# EAGLE board UD0012 (EAGLE 6.1)
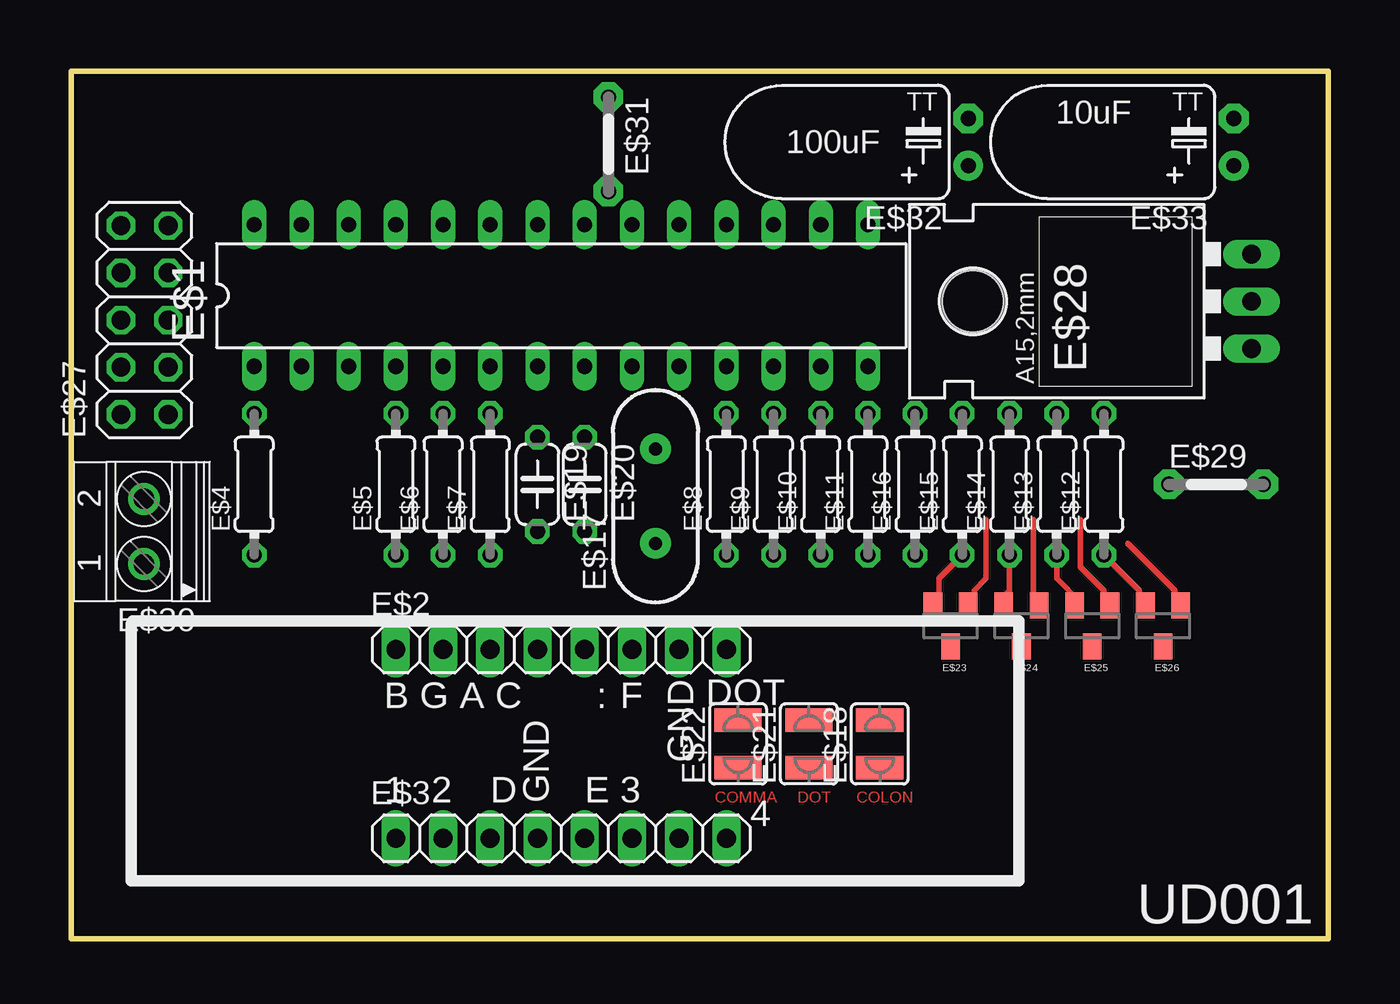
[diagram p0: board, top side]
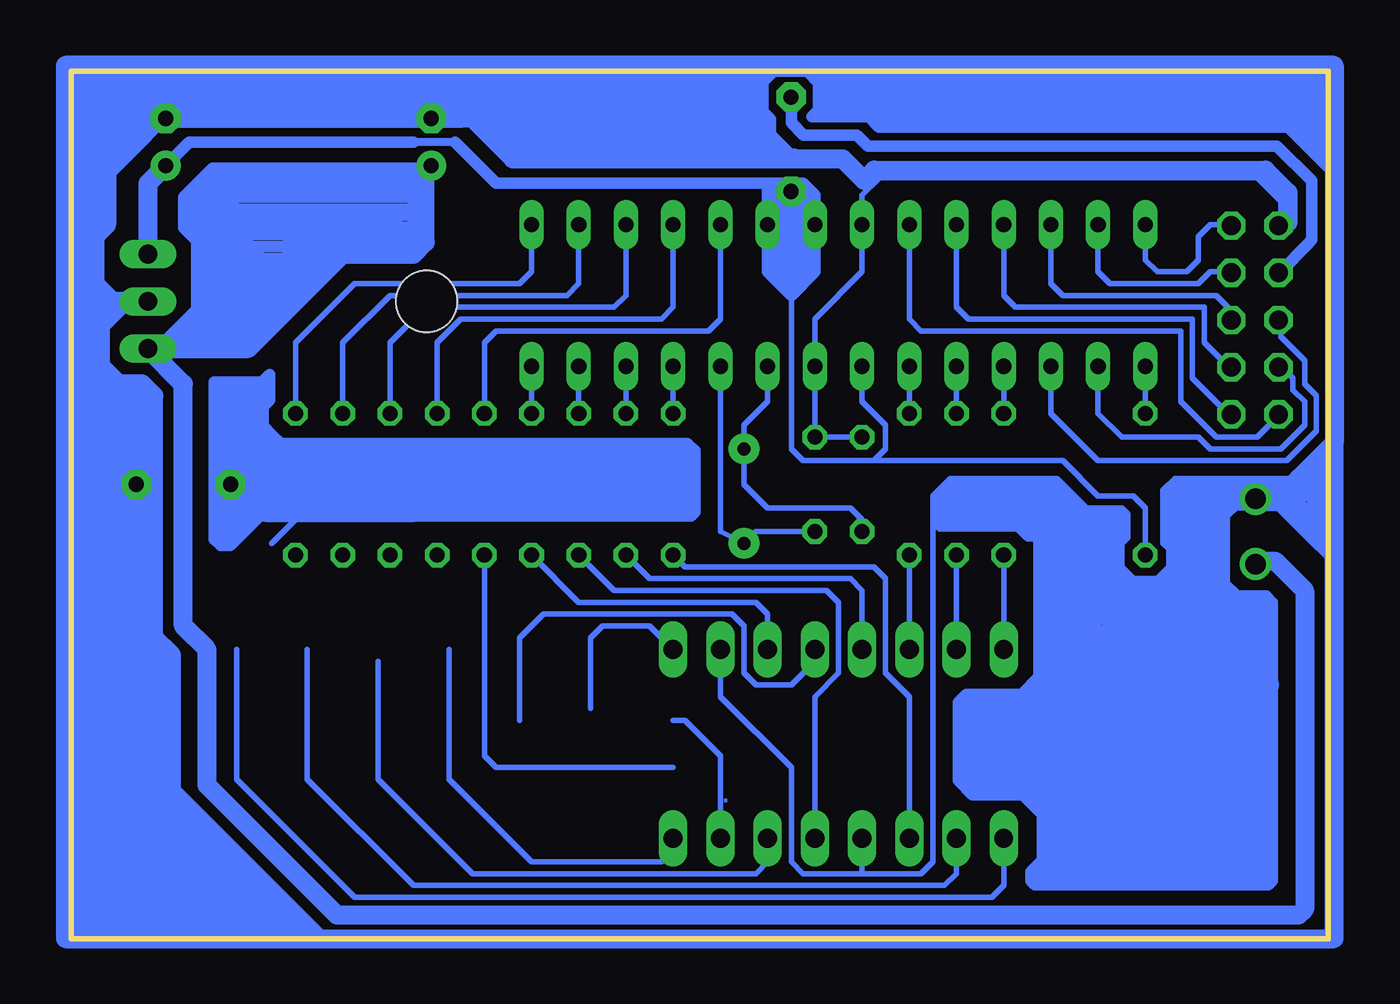
[diagram p1: board, bottom side, seen from below]

Size 67.63 x 46.67 mm. Coordinates in mm from the lower left corner, seen from the top.
Outline: 67.63,46.67 0,46.67 0,0 67.63,0 67.63,46.67
Copper layers (1*16): Top 0.035mm / dielectric 1.5mm / Bottom 0.035mm
Design rules: minimum track width 10mil, minimum drill 24mil, track to track 8mil, track to pad 8mil, pad to pad 8mil, via to via 8mil, smd to smd 8mil, copper to edge 40mil, drill to drill 8mil, minimum pad ring 10mil, minimum via ring 8mil, stop-mask expansion 4mil, vias tented up to drill 0mil, thermal gap 10mil

## Footprints (pad centres in the part's own frame; a part is rotated, then mirrored left to right if it is on the bottom)
DIL28-3 = drill 0.813 long: 1 -16.51,-3.81; 2 -13.97,-3.81; 3 -11.43,-3.81; 4 -8.89,-3.81; 5 -6.35,-3.81; 6 -3.81,-3.81; 7 -1.27,-3.81; 8 1.27,-3.81; 9 3.81,-3.81; 10 6.35,-3.81; 11 8.89,-3.81; 12 11.43,-3.81; 13 13.97,-3.81; 14 16.51,-3.81; 15 16.51,3.81; 16 13.97,3.81; 17 11.43,3.81; 18 8.89,3.81; 19 6.35,3.81; 20 3.81,3.81; 21 1.27,3.81; 22 -1.27,3.81; 23 -3.81,3.81; 24 -6.35,3.81; 25 -8.89,3.81; 26 -11.43,3.81; 27 -13.97,3.81; 28 -16.51,3.81
1X08 = drill 1.016 long: 1 -8.89,0; 2 -6.35,0; 3 -3.81,0; 4 -1.27,0; 5 1.27,0; 6 3.81,0; 7 6.35,0; 8 8.89,0
0204/7 = drill 0.813 octagon: 1 -3.81,0; 2 3.81,0
HC49US = drill 0.7 pad 1.651: 1 -2.54,0; 2 2.54,0
SJW = smd 1.27 x 2.54: 1 -1.27,0; 2 1.27,0
C050-024X044 = drill 0.813 octagon: 1 -2.54,0; 2 2.54,0
SOT23 = smd 1 x 1.4: 1 -0.95,-1.1; 2 0.95,-1.1; 3 0,1.1
2X05 = drill 1.016 octagon: 1 -5.08,-1.27; 2 -5.08,1.27; 3 -2.54,-1.27; 4 -2.54,1.27; 5 0,-1.27; 6 0,1.27; 7 2.54,-1.27; 8 2.54,1.27; 9 5.08,-1.27; 10 5.08,1.27
78XXL = drill 1.016 long: GND 0,-3.81; IN -2.54,-3.81; OUT 2.54,-3.81 | hole 3.302: 0,11.176
05 = drill 0.813 pad 1.6 octagon: 1 -2.54,0; 2 2.54,0
1751248 = drill 1.1 pad 1.7: 1 -1.75,-0.1; 2 1.75,-0.1
TT2D6L = drill 0.813 pad 1.6: + -1.27,0 | drill 0.813 pad 1.6 octagon: - 1.27,0

## Placement (x,y rotation side)
E$1  [DIL28-3]  26.35,34.61 0 top
E$2  [1X08]  26.35,15.56 0 top
E$3  [1X08]  26.35,5.4 0 top
E$4  [0204/7]  9.84,24.45 90 top
E$5  [0204/7]  17.46,24.45 90 top
E$6  [0204/7]  20,24.45 90 top
E$7  [0204/7]  22.54,24.45 90 top
E$8  [0204/7]  35.24,24.45 90 top
E$9  [0204/7]  37.78,24.45 90 top
E$10  [0204/7]  40.32,24.45 90 top
E$11  [0204/7]  42.86,24.45 90 top
E$12  [0204/7]  55.56,24.45 90 top
E$13  [0204/7]  53.02,24.45 90 top
E$14  [0204/7]  50.48,24.45 90 top
E$15  [0204/7]  47.94,24.45 90 top
E$16  [0204/7]  45.4,24.45 90 top
E$17  [HC49US]  31.43,23.81 90 top
E$18  [SJW]  43.5,10.48 90 top
E$19  [C050-024X044]  25.08,24.45 270 top
E$20  [C050-024X044]  27.62,24.45 270 top
E$21  [SJW]  39.69,10.48 90 top
E$22  [SJW]  35.88,10.48 90 top
E$23  [SOT23]  47.31,16.83 180 top
E$24  [SOT23]  51.12,16.83 180 top
E$25  [SOT23]  54.93,16.83 180 top
E$26  [SOT23]  58.74,16.83 180 top
E$27  [2X05]  3.94,33.29 90 top
E$28  [78XXL]  59.69,34.29 90 top
E$29  [05]  61.59,24.45 0 top
E$30  [1751248]  3.81,21.91 90 top
E$31  [05]  28.9,42.74 270 top
E$32  [TT2D6L]  48.26,42.86 90 top
E$33  [TT2D6L]  62.55,42.86 90 top

## Library data of the parts
E$1 = atmel
E$2 E$3 E$27 = pinhead
E$4-E$16 E$19 E$20 E$32 E$33 = rcl
E$17 = SparkFun-FreqCtrl
E$18 E$21 E$22 E$29 E$31 = jumper
E$23-E$26 = SparkFun-DiscreteSemi
E$28 = SparkFun-PowerIC
E$30 = con-phoenix-350

## Nets
S$1: E$1.1 E$4.2
S$2: E$1.4 E$5.2
S$3: E$1.5 E$6.2
S$4: E$1.6 E$7.2
S$5: E$1.11 E$8.2
S$6: E$1.12 E$9.2
S$7: E$1.13 E$10.2
S$8: E$1.14 E$11.2
S$9: E$16.1
S$10: E$1.10 E$17.1 E$20.2
S$18: E$1.23
S$19: E$1.24
S$20: E$1.25
S$21: E$1.26
S$22: E$1.27
S$23: E$1.28
S$24: E$16.2
S$25: E$15.2
S$26: E$14.2
S$27: E$13.2
S$28: E$12.2
S$29: E$1.2
S$31: E$2.1 E$5.1
S$32: E$6.1
S$33: E$2.3 E$7.1
S$34: E$3.3 E$8.1
S$35: E$2.4 E$9.1
S$36: E$3.5 E$10.1
S$37: E$2.6 E$11.1
S$38: E$2.5
S$39: E$3.8
S$40: E$3.6
S$42: E$3.1
S$44: E$2.8
S$45: E$3.7
S$46: E$1.7 E$1.20 E$1.21 E$28.OUT
S$47: E$15.1
S$48: E$14.1
S$49: E$13.1
S$50: E$12.1
S$57: E$28.IN E$32.+
S$59: E$1.9 E$17.2 E$19.2
S$69: E$29.1
S$72: E$32.-
S$73: E$28.GND
S$74: E$2.7 E$3.4
S$89: E$1.8 E$1.22 E$19.1 E$20.1

## Tracks (layer width: path | path; a pad name or v marks a point on that pad's centre or on a via)
S$1
  Bottom 0.305: E$4.2 E$1.1
S$2
  Bottom 0.305: E$5.2 E$1.4
S$3
  Bottom 0.305: E$6.2 E$1.5
S$4
  Bottom 0.305: E$7.2 E$1.6
S$5
  Bottom 0.305: E$8.2 E$1.11
S$6
  Bottom 0.305: E$9.2 E$1.12
S$7
  Bottom 0.305: E$10.2 E$1.13
S$8
  Bottom 0.305: E$11.2 E$1.14
S$9
  Bottom 0.305: 35.24,9.21 44.77,9.21 45.4,9.84 E$16.1
S$10
  Bottom 0.305: E$1.10 32.7,21.91 E$17.1 30.8,21.91 E$20.2
S$12
  Bottom 0.305: 32.7,38.42 32.7,33.34 33.34,32.7 44.77,32.7
S$13
  Bottom 0.305: 35.24,38.42 35.24,33.97 35.88,33.34 46.67,33.34
S$14
  Bottom 0.305: 37.78,38.42 37.78,34.61 38.42,33.97 47.31,33.97
S$15
  Bottom 0.305: 40.32,38.42 40.32,35.24 40.96,34.61 47.31,34.61
S$16
  Bottom 0.305: 42.86,38.42 42.86,35.88 43.5,35.24 47.31,35.24
S$17
  Bottom 0.305: 46.98,42.87 49.12,42.87 49.19,42.79 46.98,42.79 46.96,42.77
S$18
  Bottom 0.305: E$1.23 22.54,33.34 21.91,32.7 7.94,32.7 7.94,28.89 6.03,26.99 3.81,26.99 2.54,28.26
S$19
  Bottom 0.305: E$1.24 20,33.97 19.37,33.34 7.3,33.34 7.3,30.16 5.4,28.26
S$20
  Bottom 0.305: E$1.25 17.46,34.61 16.83,33.97 6.67,33.97 6.67,32.07 5.4,30.8
S$21
  Bottom 0.305: E$1.26 14.92,35.24 14.29,34.61 6.03,34.61 5.4,33.97 5.4,33.34 5.08,33.02
S$22
  Bottom 0.305: E$1.27 12.38,35.88 11.75,35.24 6.99,35.24 6.35,35.88 5.08,35.88
S$23
  Bottom 0.305: E$1.28 9.84,36.51 9.21,35.88 7.62,35.88 6.99,36.51 6.99,37.78 6.35,38.42 5.4,38.42
S$24
  Bottom 0.305: E$16.2 45.4,32.07 44.77,32.7
S$25
  Bottom 0.305: 44.77,33.34 46.67,33.34 47.94,32.07 E$15.2
S$26
  Bottom 0.305: 44.77,33.97 48.58,33.97 50.48,32.07 E$14.2
S$27
  Bottom 0.305: 44.77,34.61 50.48,34.61 53.02,32.07 E$13.2
S$28
  Bottom 0.305: 44.77,35.24 52.39,35.24 55.56,32.07 E$12.2
S$29
  Bottom 0.305: E$1.2 12.38,28.26 11.11,26.99 6.99,26.99 6.35,26.35 2.54,26.35 1.27,27.62 1.27,28.89 1.9,29.53 1.9,30.16 2.54,30.8
S$30
  Bottom 0.305: 14.92,30.16 14.92,28.26 12.38,25.72 2.22,25.72 0.64,27.31 0.64,29.21 1.27,29.84 1.27,31.11 2.54,32.39 2.54,33.34
S$31
  Bottom 0.305: E$2.1 E$5.1
S$32
  Bottom 0.305: 20,16.19 E$6.1
S$33
  Bottom 0.305: E$2.3 E$7.1
S$34
  Bottom 0.305: E$3.3 22.54,13.02 23.81,14.29 23.81,19.37 24.45,20 34.61,20 E$8.1
S$35
  Bottom 0.305: E$2.4 25.08,18.73 25.72,19.37 36.51,19.37 E$9.1
S$36
  Bottom 0.305: E$3.5 27.62,13.02 26.35,14.29 26.35,18.1 26.99,18.73 38.42,18.73 E$10.1
S$37
  Bottom 0.305: E$2.6 30.16,17.46 30.8,18.1 40.32,18.1 E$11.1
S$38
  Bottom 0.305: E$2.5 27.62,14.92 28.89,13.65 30.8,13.65 31.43,14.29 31.43,16.83 32.07,17.46 42.23,17.46 43.5,16.19 43.5,11.75
S$39
  Bottom 0.305: E$3.8 35.24,4.76 35.88,4.13 42.86,4.13 47.31,8.57 47.31,15.56
S$40
  Bottom 0.305: E$3.6 30.16,4.13 30.8,3.49 46.04,3.49 51.12,8.57 51.12,14.92
S$41
  Bottom 1.016: 0.32,22.54 0.32,25.08
S$42
  Bottom 0.305: E$3.1 17.46,2.86 18.1,2.22 52.39,2.22 58.74,8.57 58.74,15.56
S$43
  Bottom 1.016: 66.04,43.81 66.04,38.73 66.36,38.42
S$44
  Bottom 0.305: E$2.8 36.51,16.83 39.05,16.83 39.69,16.19 39.69,12.38
S$45
  Bottom 0.305: E$3.7 32.7,9.84 34.61,11.75 35.24,11.75
S$46  (via drill 0.6)
  Bottom 0.305: E$1.7 25.08,28.89 23.81,27.62 23.81,26.35 24.45,25.72 | 28.89,34.61 28.89,26.35 28.26,25.72 24.45,25.72 | 24.45,25.72 14.29,25.72 12.38,23.81 10.48,23.81 9.84,23.18 9.84,20.32 | 30.16,40.32 30.48,40.64 | 46.99,42.86 49.53,42.86
  Bottom 0.61: 30.16,40.32 E$1.20 30.16,35.88 28.89,34.61 27.62,35.88 E$1.21 27.62,40 28.26,40.64 30.48,40.64 44.77,40.64 46.99,42.86 | 49.21,42.86 49.53,42.86 61.28,42.86 62.87,41.28
  Bottom 1.016: E$28.OUT 63.5,40.64 62.87,41.28 v62.55,41.59
S$47
  Top 0.305: 46.67,18.1 46.67,19.37 E$15.1
S$48
  Top 0.305: 49.85,17.46 49.85,18.1 50.48,18.73 E$14.1
S$49
  Top 0.305: 54.29,18.1 53.02,19.37 E$13.1
S$50
  Top 0.305: 57.47,18.1 57.47,18.73 E$12.1
S$51
  Bottom 0.305: 54.93,15.56 54.93,8.57 49.21,2.86 20.64,2.86 20,3.49 20,5.4
S$52
  Top 0.305: 51.75,18.1 51.75,22.54
S$53
  Top 0.305: 55.56,18.1 55.56,18.73 54.29,20 54.29,22.54
S$54
  Top 0.305: 48.58,18.1 48.58,18.73 49.21,19.37 49.21,22.54
S$55
  Bottom 1.016: 0.64,23.5 0.64,23.18
S$56
  Bottom 0.305: 50.01,42.9 46.98,42.9 46.98,42.91 46.98,42.93 49.75,42.93 49.8,42.89
S$57
  Bottom 1.016: 4.13,20.32 2.86,20.32 1.27,18.73 1.27,1.59 1.59,1.27 53.34,1.27 60.32,8.26 60.32,15.56 61.59,16.83 61.59,29.84 E$28.IN 58.1,31.75 53.02,36.83 49.21,36.83 48.58,37.47 48.58,41.28 E$32.+
S$58
  Bottom 1.016: 67.31,33.66 67.31,6.03 66.67,5.4
S$59
  Bottom 0.305: E$1.9 30.16,28.89 31.43,27.62 E$17.2 31.43,24.45 30.16,23.18 25.72,23.18 25.08,22.54 E$19.2
S$60
  Bottom 1.016: 65.72,28.89 65.72,9.21 65.72,7.62 | 65.72,7.62 65.4,7.3 | 65.72,7.62 65.72,2.86
S$61
  Bottom 1.016: 65.09,28.89 65.09,11.11 65.09,10.48 | 65.09,10.48 64.77,10.16 | 65.09,10.48 65.09,4.13 65.72,3.49
S$62
  Bottom 1.016: 64.45,28.26 64.45,13.65
S$63
  Bottom 1.016: 63.82,15.56 63.82,2.86
S$64
  Bottom 1.016: 64.77,13.33 64.77,3.18
S$65
  Bottom 1.016: 66.99,7.94 66.99,0.63 55.88,0.63 62.87,7.62 62.87,15.24 63.18,15.56
S$66
  Bottom 1.016: 62.87,5.08 61.28,5.08 57.47,1.27 57.79,1.27 63.5,6.98
S$67
  Bottom 1.016: 63.18,5.72 62.87,5.72 58.42,1.27
S$68
  Bottom 1.016: 58.74,1.27 65.72,1.27 66.04,1.59 66.04,4.44 66.36,4.76 66.36,0.95 65.09,2.22 61.28,2.22 60.96,1.91 60.32,1.91 | 59.37,1.91 60.32,1.91 | 60.32,1.91 62.55,4.13 62.87,4.13 63.18,4.44 63.18,3.81 62.23,2.86 62.87,2.86 63.18,3.18 63.82,3.18 64.14,2.86 65.09,2.86
S$69
  Bottom 0.305: 55.56,22.54 56.83,21.27 | 49.21,22.54 55.56,22.54 | 55.56,22.54 57.15,22.54 E$29.1
S$70
  Bottom 1.016: 29.77,40.31 29.77,36.01 29.05,35.29 28.89,35.29 28.01,36.17 28.01,39.65 28.45,40.09 29.33,40.09 29.33,36.17 29.05,35.9 29.05,36.07 28.5,36.62 28.5,39.1 28.67,39.26
S$71
  Bottom 1.016: 46.62,44.17 46.07,44.17 43.87,41.96 26.13,41.96 24.98,40.8 | 24.98,40.8 | 24.98,40.8 24.43,41.36 3.38,41.36 2.17,40.14 2.17,38.54 2.39,38.32
S$72
  Bottom 0.406: 45.09,46.67 45.72,46.67 E$32.- 62.23,44.13 | 62.23,44.13 64.77,46.67 | 62.23,44.13 62.87,44.13 65.4,46.67
  Bottom 1.016: 46.35,46.67 48.26,44.77 62.87,44.77 64.77,46.67
S$73
  Bottom 1.016: 46.99,46.36 63.82,46.36 63.82,46.04 63.5,45.72 47.62,45.72 47.94,45.4 61.59,45.4 | 61.59,45.4 62.23,45.4 | 63.82,44.45 63.82,43.5 65.72,41.59 65.72,41.28 | 65.72,41.28 65.72,38.42 66.36,37.78 66.36,35.24 65.4,34.29 | E$28.GND 65.4,34.29 | 65.4,34.29 67.63,34.29 | 61.59,45.4 65.72,41.28
S$74
  Bottom 0.305: 1.59,24.76 8.25,24.76 8.89,24.13 8.89,23.81 | E$3.4 25.08,3.49 | 25.08,3.49 28.26,3.49 28.89,4.13 28.89,9.21 32.7,13.02 E$2.7 | 25.08,3.49 21.91,3.49 21.27,4.13 21.27,23.81 20.32,24.76 14.6,24.76 13.02,23.18 11.11,23.18 10.79,22.86 10.79,21.59 11.11,21.27 11.11,20 10.48,19.37 9.21,19.37 8.57,20 8.57,20.95 8.89,21.27 8.89,22.54 | 3.49,23.18 8.25,23.18 | 8.25,23.18 8.57,22.86 | 8.57,22.86 8.89,22.54 | 8.89,22.54 8.89,23.81 | 8.89,23.81 8.57,24.13 | 8.57,24.13 8.25,24.45 7.62,24.45 | 2.22,24.45 7.3,24.45 | 7.3,24.45 7.62,24.45 | 7.62,24.45 7.94,24.13 | 7.94,24.13 8.57,23.5 | 8.57,23.5 8.57,23.81 8.57,24.13 | 8.57,24.13 8.25,24.13 7.94,24.13 | 8.57,23.5 8.57,23.18 | 8.57,22.86 8.57,23.18 | 8.57,23.18 7.3,24.45 | 7.3,24.45 7.3,24.13 | 7.3,24.13 7.94,23.5 | 7.94,23.5 7.62,23.5 6.99,24.13 | 2.54,24.13 6.99,24.13 | 6.99,24.13 7.3,24.13 | 7.94,23.5 8.25,23.18
  Bottom 0.61: 2.22,24.45 7.94,24.45 8.25,24.13 | 8.25,24.13 7.62,23.5 3.81,23.5 3.49,23.81 | 1.59,23.81 6.99,23.81 | 8.25,24.13 8.57,23.81 8.57,23.18
  Bottom 1.016: 66.36,46.36 67.31,46.36 67.63,46.04 67.63,45.72 66.99,45.09 46.67,45.09 45.4,46.36 44.45,46.36 | -0.32,26.67 -0.32,46.99 43.81,46.99 | -0.32,26.67 1.59,24.76 2.86,23.5 3.81,23.5 | 43.81,46.99 44.45,46.99 | 44.45,46.99 67.95,46.99 67.95,0 54.29,0 | 54.29,0 -0.32,0 -0.32,20.64 | -0.32,20.64 -0.32,21.27 | -0.32,21.27 -0.32,21.91 | -0.32,21.91 -0.32,26.67 | -0.32,21.27 0.32,21.27 2.54,23.5 | -0.32,21.91 0.32,21.91 1.9,23.5 1.59,23.81 0.64,24.76 | 1.27,22.54 1.27,22.23 -0.32,20.64 | 54.29,0 62.23,7.94 62.23,15.24 63.18,16.19 | 63.18,16.19 63.82,16.83 | 63.18,16.19 63.18,29.21 63.82,29.84 65.09,29.84 66.04,30.8 66.04,33.02 65.09,33.97 66.36,33.97 66.99,33.34 66.99,30.8 66.36,30.16 | 66.36,30.16 65.4,29.21 64.45,29.21 63.82,28.58 63.82,16.19 | 66.36,30.16 66.36,6.03 | 44.45,46.99 44.45,46.36 | 44.45,46.36 46.67,44.13 64.14,44.13 | 64.14,44.13 65.09,44.13 | 65.09,44.13 66.99,44.13 | 66.99,44.13 67.31,44.13 67.63,44.45 66.99,44.45 66.36,45.09 65.09,45.09 | 62.55,45.09 65.09,45.09 | 65.09,45.09 66.04,46.04 65.4,46.04 65.09,45.72 66.99,45.72 67.63,46.36 | 44.45,46.36 43.81,46.99 | 66.99,34.61 66.99,44.13 | 64.14,44.13 65.4,42.86 | 65.09,44.13 65.09,43.5 65.4,43.18
S$75
  Bottom 0.61: 2.61,35.62 2.61,35.85 1.02,37.44 1.02,37.47 0.88,37.61 0.88,40.77 2.76,42.65 24.77,42.65 25.35,43.23 28.22,43.23 28.89,43.89 28.89,45.18
S$76
  Bottom 0.61: 28.73,42.21 28.95,42.21 30.01,43.26 30.01,44.09 30.42,44.5 30.42,46.1 29.85,46.67 28.03,46.67 27.42,46.07 27.42,44.57 27.78,44.22 24.72,44.22 24.17,43.68 2.16,43.68 -0.11,41.41 -0.11,46.1 0.15,46.35 27.11,46.35 27.14,46.38 27.14,45.01 26.79,44.66 24.46,44.66 23.92,44.12 2.03,44.12 0.15,42.24 0.15,45.49 0.5,45.84 26.76,45.84 26.98,45.62 26.76,45.62 26.56,45.43 0.94,45.43 0.53,45.01 0.53,44.89 0.56,44.85 26.4,44.85 26.76,45.2 24.59,45.2 23.76,44.38 0.63,44.38 0.56,44.31 0.56,43.48 0.37,43.29 0.88,43.29 1.39,43.8 0.88,43.8 0.82,43.87 0.82,43.77 0.72,43.68 1.36,43.68 1.52,43.83
S$77
  Bottom 0.61: 29.78,42.53 43.32,42.53 45.49,44.69 32.24,44.69 30.58,46.35 43.8,46.35 44.98,45.17 32.33,45.17 31.54,45.97 43.45,45.97 43.93,45.49 43.01,45.49 42.97,45.46 31.79,45.46 31.76,45.49
S$78
  Bottom 0.61: 30.83,45.75 30.83,44.15 30.45,43.77 30.45,43.04 30.29,42.88
S$79
  Bottom 0.61: 30.42,42.91 43.17,42.91 44.63,44.38
S$80
  Bottom 0.61: 44.5,44.28 32.17,44.28 31.18,45.27
S$81
  Bottom 0.61: 31.25,44.73 31.25,43.93 30.77,43.45
S$82
  Bottom 0.61: 30.87,43.42 43.23,43.42 43.52,43.71
S$83
  Bottom 0.61: 43.77,43.77 32.05,43.77 31.38,44.44
S$84
  Bottom 0.61: 31.47,43.93 31.47,43.8 31.5,43.77 44.7,43.77 45.17,44.25
S$85
  Bottom 0.61: 48.26,41.47 60.01,41.47 61.57,39.9 61.57,38.25 60.88,37.56 60.88,33.84 62.77,31.96 61.94,31.96 60.52,33.38 60.52,37.93 61.02,38.44 61.02,39.81 59.83,41.01 49.23,41.01 49.23,37.75 49.46,37.52 53.36,37.52 58.54,32.33 60.65,32.33 60.79,32.47 60.75,32.47 60.24,32.97 60.24,40 60.47,40.23 60.47,38.89 60.61,38.76 60.61,32.56 61.11,32.05 60.15,32.05 59.51,32.7 59.51,41.1 59.55,41.14 59.55,41.01 60.01,40.55 60.01,32.42 59.78,32.19 59.46,32.19 59.23,32.42 59.23,40.91 49.92,40.91 49.41,40.41 59.19,40.41 59.19,40.09 59,39.9 49.23,39.9 49,40.13 49,39.63 49.36,39.26 58.73,39.26 58.86,39.4 58.86,38.94 58.96,38.85 50.01,38.85 49.92,38.94 49.23,38.94 48.58,38.3 50.56,38.3 50.74,38.48 59.32,38.48 59.37,38.44 59.37,33.48 58.59,32.7 58.59,33.02 53.36,38.25 50.1,38.25 49.73,37.88 59.05,37.88 59.14,37.98 59.14,33.89 58.73,33.48 58.73,37.43 58.68,37.47 58.68,34.53 57.4,33.25 57.72,33.25 58.13,33.66 58.13,33.71 56.52,35.31 56.52,35.77 55.01,37.29 54.6,37.29 54.41,37.47 55.88,37.47 56.11,37.24 58.08,37.24 58.18,37.15 58.5,37.15 58.5,36.51 58.22,36.23 58.22,37.56 58.18,37.61 58.18,35.96 57.99,35.77 57.99,35.13 58.04,35.08 58.04,34.53 58.18,34.39 58.18,35.63 58.22,35.68 57.99,35.68 57.95,35.73 57.95,35.5 57.53,35.08 | 57.53,35.08 57.53,34.99 | 57.53,34.99 57.53,34.76 | 57.53,35.08 57.53,35.45 57.21,35.77 57.21,36.05 57.17,36.09 56.07,36.09 55.56,36.6 55.56,36.78 55.65,36.87 55.93,36.87 56.2,36.6 57.35,36.6 57.4,36.64 57.9,36.64 57.9,36.14 57.81,36.05 57.63,36.05 57.49,35.91 56.98,35.91 | 56.94,35.91 56.98,35.91 | 56.98,35.91 57.07,36 57.07,35.68 56.98,35.59 56.98,35.5 57.17,35.31
  Bottom 0.61: 57.17,35.31 | 57.17,35.31 57.3,35.18 57.35,35.18 57.53,34.99 | 57.53,34.99 59.75,34.99 59.93,35.17
S$86
  Bottom 0.61: 34.47,22.74 57.48,22.74 59.07,21.16 59.6,21.16 59.93,21.49 59.93,29.96 57.35,29.96 56.95,30.35 56.95,28.98 57.31,28.62 57.31,27.58 56.81,27.08 | 56.81,27.08 | 56.81,27.08 56.37,26.64 34.51,26.64 34.4,26.53 34.4,22.89 34.29,22.78
S$87
  Bottom 0.61: 35.77,23.75 35.77,23.65 34.87,22.75 34.28,22.75 34.08,22.95 34.08,26.25 34.45,26.62
S$88
  Bottom 0.61: 34.59,26.09 41.91,26.09 41.99,26.16
S$89
  Bottom 0.305: E$19.1 E$20.1 E$1.8 27.62,33.34 25.08,35.88 E$1.22 25.08,40 24.13,40.96 3.81,40.96 2.54,39.69 2.54,38.73 2.86,38.42
S$90
  Bottom 0.61: 34.56,23.19 57.61,23.19 59.2,21.6 59.44,21.6 59.49,21.65 59.49,29.46 59.6,29.57 57.39,29.57 57.26,29.7 57.26,29.25 57.42,29.09 58.85,29.09 58.93,29.17 58.93,28.96 59.04,28.85 59.04,22.34 59.12,22.26 59.12,22.34 58.48,22.98 58.48,28.45 58.56,28.53 58.3,28.53 58.24,28.48 57.95,28.48 57.9,28.53 57.55,28.53 57.39,28.37 57.55,28.37 57.61,28.32 57.95,28.32 58.32,27.95 57.79,27.95 57.61,27.76 57.61,27.81 57.55,27.87 57.66,27.87 58.06,27.47 58.06,23.43 58.35,23.14 58.11,23.14 57.76,23.49 35.2,23.49 34.85,23.83 34.85,25.42 34.69,25.58 34.69,24.42 34.8,24.31 34.8,23.65 34.64,23.49 34.64,25.45 34.98,25.8 56.78,25.8 58.22,27.23 57.84,27.23 57.69,27.39 57.53,27.39 56.3,26.17 36.18,26.17 35.06,25.05 56.36,25.05 58,26.7 58,24.34 57.71,24.04 57.26,24.04 57.1,23.88 35.65,23.88 35.25,24.28 35.25,24.5 35.27,24.52 56.36,24.52 57.66,25.82 57.66,25.16 57.61,25.11 57.61,24.55 57.55,24.5 57.34,24.5 57.13,24.71 57.13,24.97 57.15,25 57.15,24.57 57.21,24.52 56.99,24.52 56.89,24.42 56.89,24.36 56.81,24.28 35.94,24.28 35.81,24.42 35.81,25.5 35.89,25.58 55.96,25.58 56.2,25.35
S$91
  Bottom 0.61: 2.89,23.39 4.98,23.39 5.59,22.78 5.59,19.09 4.93,18.43 3.33,18.43 3,18.1 3,3.11 3.22,2.89 15.78,2.89 16,3.11 16,3.61 15.39,4.21 15.39,6.69 16.44,7.74 19.14,7.74 19.91,8.51 19.91,12.7 19.47,13.14 16.49,13.14 15.56,14.08 15.56,21.46 15.89,21.79 15.89,23 15.34,23.55 14.95,23.55 13.9,22.51 13.88,22.51 13.58,22.21 12.32,22.21 11.99,21.87 11.99,19.55 11.01,18.58 11.54,18.58 12.12,18
S$92
  Bottom 0.61: 15.75,21.68 16.14,21.68 16.68,22.21 20.88,22.21 21.08,22.41 21.08,23.62 20.22,24.49 14.73,24.49 14.18,23.93 14.18,23.8 13.36,22.98 11.52,22.98 11.1,22.56 11.1,21.74 11.23,21.61 11.23,21.72 11.63,22.12 11.63,22.56 11.74,22.67 11.74,22.45 12.16,22.03 12.16,22.38 12.21,22.43 12.12,22.43 12.1,22.45 13.4,22.45 15.06,24.11 20.28,24.11 20.92,23.47 20.92,22.8 20.77,22.65 16.7,22.65 16.23,22.18 16.23,23 16.21,23.03 16.21,23.25 15.75,23.71 20.06,23.71 20.37,23.4 20.37,23.36 20.61,23.11 19.49,23.11 19.35,22.98 16.61,22.98 16.43,23.16 16.63,23.16 16.72,23.25 18.93,23.25 19.11,23.42 19.24,23.42 19.26,23.45
S$93
  Bottom 0.61: 11.56,21.54 11.56,19.2 11.43,19.06
S$94
  Top 0.305: 56.83,21.27 59.37,18.73 59.37,18.1
S$95
  Bottom 0.61: 11.5,20.39 11.5,19.55 10.88,18.93
S$96
  Bottom 0.61: 11.39,19.84 11.39,19.75 10.44,18.8
S$97
  Bottom 0.61: 10.95,18.87 8.91,18.87 8.51,19.26
S$98
  Bottom 0.61: 8.2,20.04 8.2,19.99 9.13,19.06 10.52,19.06
S$99
  Bottom 0.61: 8.07,20.1 8.07,22.25 8.53,22.72
S$100
  Bottom 0.61: 8.56,22.58 8.56,21.39 8.27,21.1 8.27,20.39 8.29,20.37
S$101
  Bottom 0.61: 8.07,23.22 8.07,22.34 8.11,22.3
S$102
  Bottom 0.61: 5.79,22.94 7.1,22.94 7.23,22.8
S$103
  Bottom 0.61: 7.47,23 7.47,22.43 7.78,22.12
S$104
  Bottom 0.61: 7.67,22.74 7.67,19.77 8.27,19.18
S$105
  Bottom 0.61: 5.9,22.58 6.72,22.58 7.36,21.94
S$106
  Bottom 0.61: 5.97,22.18 6.59,22.18 7.56,21.21
S$107
  Bottom 0.61: 5.88,21.68 6.68,21.68 7.69,20.66
S$108
  Bottom 0.61: 5.64,21.23 6.72,21.23 8.11,19.84
S$109
  Bottom 0.61: 5.81,20.7 6.59,20.7 7.41,19.88
S$110
  Bottom 0.61: 5.81,20.13 6.59,20.13 7.45,19.26
S$111
  Bottom 0.61: 5.81,19.57 7.36,19.57 7.94,19
S$112
  Bottom 0.61: 5.57,19.09 8.09,19.09 8.31,18.87
S$113
  Bottom 0.61: 5.55,18.56 10.46,18.56 10.5,18.51
S$114
  Bottom 0.61: 5.04,18.2 13.02,18.2 13.09,18.14
S$115
  Bottom 0.61: 15.33,23.14 15.33,20.99 15.37,20.95
S$116
  Bottom 0.61: 14.95,23.14 14.95,14.37 15.37,13.95
S$117
  Bottom 0.61: 14.55,22.89 14.55,14.44 14.04,13.93
S$118
  Bottom 0.61: 14.04,22.3 14.04,14.09 13.8,13.84
S$119
  Bottom 0.61: 13.58,22.18 13.58,12.4 13.69,12.29
S$120
  Bottom 0.61: 13.05,22.1 13.05,13.29 12.98,13.22
S$121
  Bottom 0.61: 12.56,21.96 12.56,14.57 12.87,14.26
S$122
  Bottom 0.61: 12.49,20.55 12.49,16.39 12.36,16.25
S$123
  Bottom 0.61: 12.1,20.06 12.1,18.22 12.16,18.16
S$124
  Bottom 0.61: 11.96,19.88 11.96,18.25 11.68,17.96
S$125
  Bottom 1.27: 3.33,17.73 11.46,17.73 11.81,17.38 4.04,17.38 3.33,16.68 3.33,3.77 3.69,3.42 15.38,3.42 15.41,3.39 15.41,3.49 14.74,4.16 14.74,7.15 15.95,8.36 18.66,8.36 19.27,8.97 19.27,12.35 19.04,12.57 16.46,12.57 14.84,14.2 14.42,14.2 13.79,13.56 14.01,13.56 14.58,12.99 15.73,12.99 16.69,12.03 17.83,12.03 18.47,11.39 18.47,9.13 18.41,9.07 18.41,10.79 17.55,11.65 17.55,8.87 17.42,8.75 17.42,9.54 17.07,9.89 17.07,10.44 16.43,11.07 16.43,8.94 16.49,8.87 16.49,11.14 15.83,11.81 15.83,11.9 15.51,12.22 15.51,8.59 15.32,8.4 15.32,12.41 14.58,13.14 14.58,7.57 14.9,7.25 14.9,4.92 14.17,4.19 4.23,4.19 4.07,4.35 4.07,16.11 4.2,16.24 12.03,16.24 12.23,16.04 12.23,14.04 14.04,12.22 14.04,4.99 13.98,4.92 4.42,4.92 4.29,5.05 4.29,14.29 | 4.29,14.29 4.29,14.96 4.67,15.34 11.72,15.34 12.07,14.99 4.99,14.99 4.29,14.29 | 4.29,14.29 12.8,14.29 13.12,13.97
S$126
  Bottom 1.27: 4.94,12.95 12.83,12.95 13.43,12.36
S$127
  Bottom 1.27: 3.29,13.64 12.24,13.64 12.28,13.69
S$128
  Bottom 1.27: 4.66,12.08 13.24,12.08 14.07,11.25
S$129
  Bottom 1.27: 4.66,11.21 13.93,11.21 14.07,11.07
S$130
  Bottom 1.27: 4.3,10.47 13.47,10.47 13.93,10.01
S$131
  Bottom 1.27: 4.48,9.69 14.12,9.69 14.16,9.65
S$132
  Bottom 1.27: 4.2,8.77 14.16,8.77 14.35,8.96
S$133
  Bottom 1.27: 4.62,7.86 14.21,7.86
S$134
  Bottom 1.27: 4.25,6.98 12.92,6.98 13.43,7.49
S$135
  Bottom 1.27: 4.34,6.48 14.53,6.48 14.58,6.43
S$136
  Bottom 1.27: 4.43,5.65 13.11,5.65 13.29,5.84

## Text on the board
Top: COMMA | DOT | COLON
Bottom: .
tPlace: 10uF | 100uF | GND | DOT | B G A C | : | F | 1 | 2 | D | GND | E | 3 | 4 | UD001